# Altium PCB COREV1.1_pcb5_0.PcbDoc (part 11 of 14)
Units mil, origin at the board's own origin, x right, y up, seen from the top; angles counter-clockwise.
Board outline 2860 x 2420 mil, 6 copper layers (Top Layer, GND, SIGNAL_1, SIGNAL_2, POWER, Bottom Layer); 110 components, 241 nets, 882 pads, 697 vias.
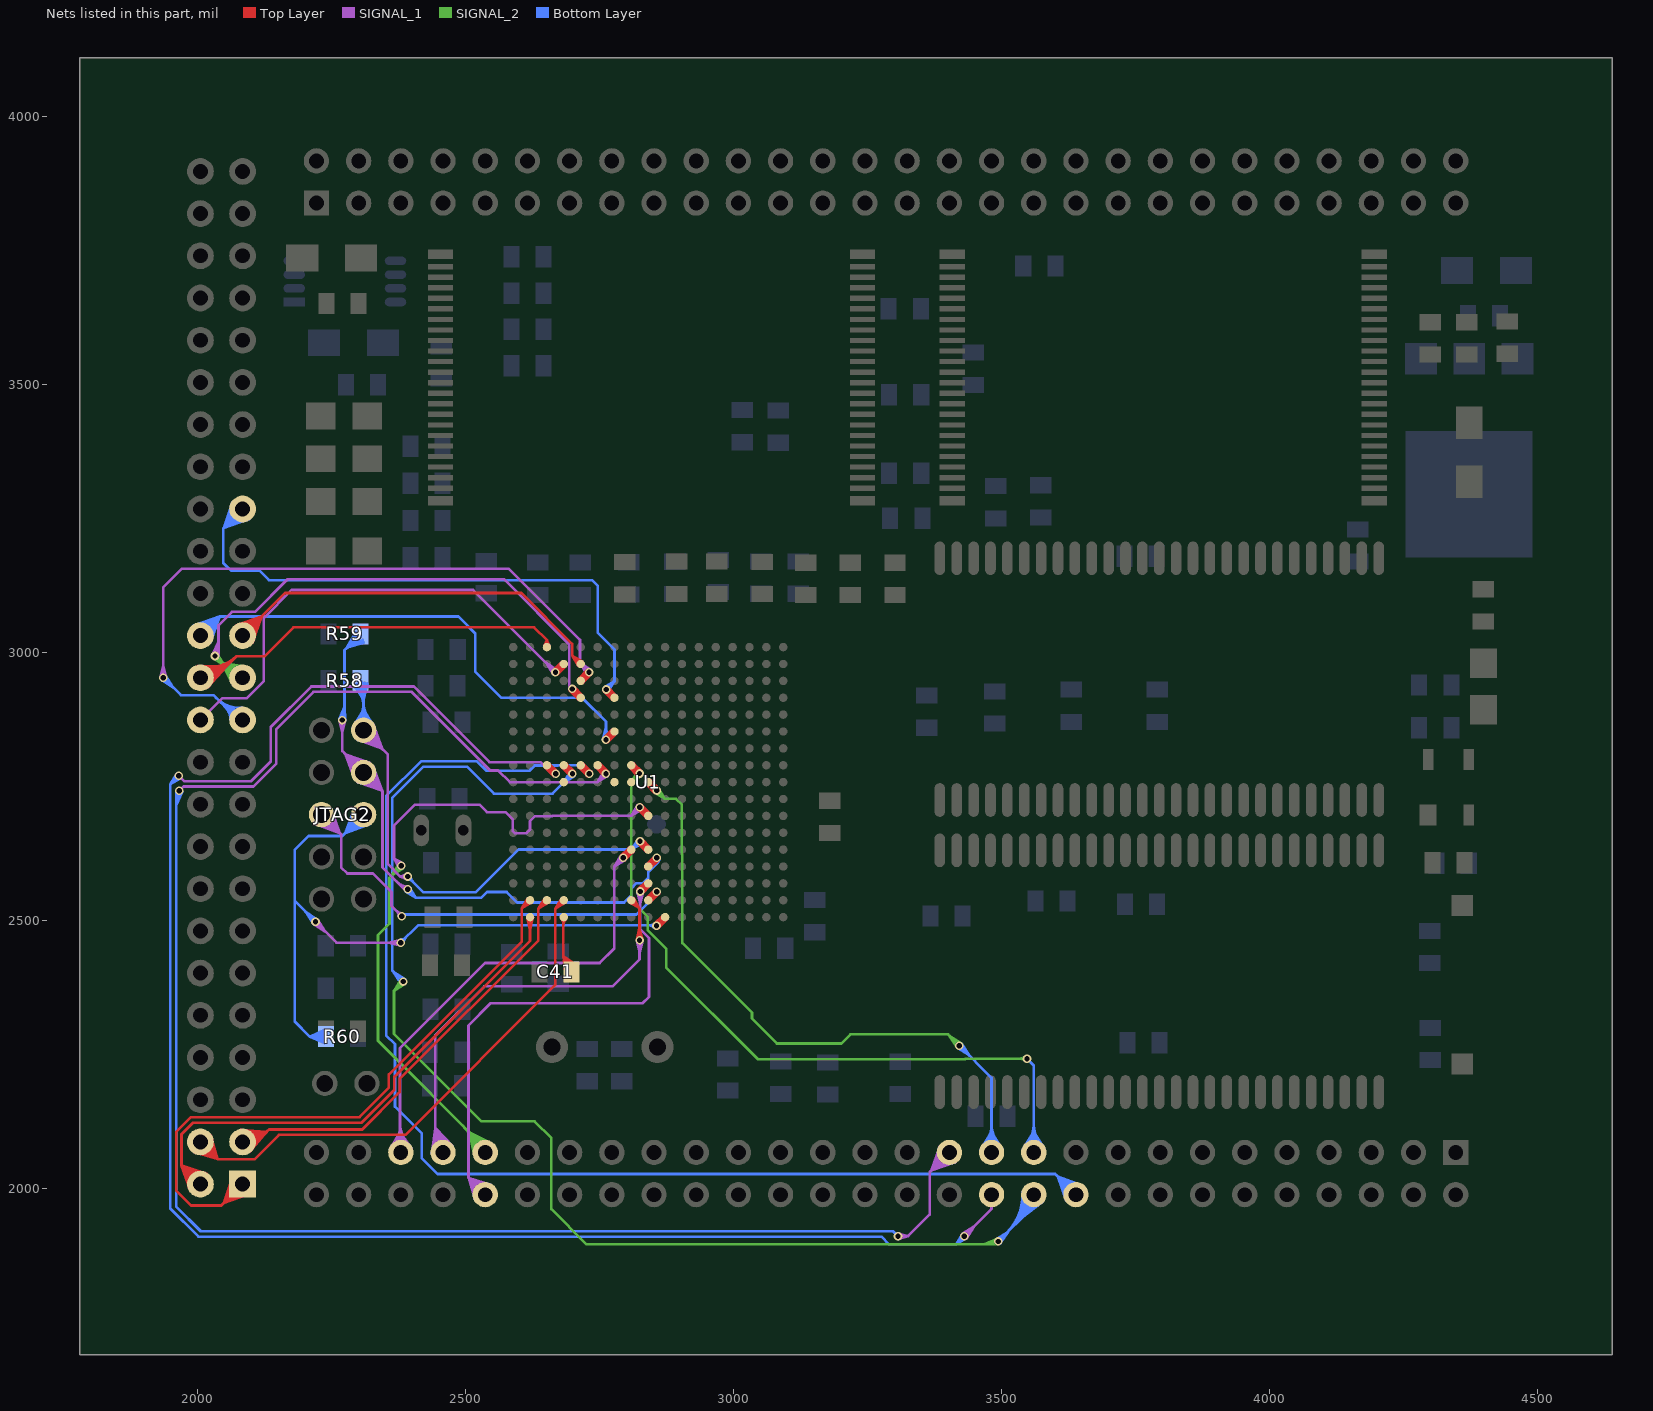
[diagram p15: the nets of this part, all layers, seen from the top]

## Via types
v1: diameter 16, hole 10, Top Layer to Bottom Layer, tented both sides, 638 vias
v2: diameter 30, hole 18, Top Layer to Bottom Layer, tented both sides, 56 vias
v3: diameter 16, hole 10, Top Layer to Bottom Layer, 2 vias
v4: diameter 30, hole 16, Top Layer to Bottom Layer, tented both sides, 1 vias

## Nets (pads, with @x,y where several pads share a name; then routed paths per layer and width w, separated by ;. In a path a pad name is that pad's centre, name@x,y a point inside that pad or via, vN(x,y) a via of type N, cw(c..) or ccw(c..) an arc to the next point about the centre after c; other vN are vias at no path point) (continued)
RXD2: pad.PA48 U1.J15 | length 1743.7
  Top Layer w5: v1@2821.39,2557.38 U1.J15@2836.64,2572.45 ; v1@2823.56,2559.05 U1.J15@2844.18,2564.91 ; v1@2825.73,2559.5 ccw(c2825.73,2572.78) 2835.12,2563.39 ccw(c2844.51,2554) v1@2831.23,2554 ; v1@2829.11,2549.66 U1.J15@2844.18,2564.91 ; v1@2830.78,2551.83 U1.J15@2836.64,2572.45 ; U1.J15@2835.51,2569.16 cw(c2822.54,2569.16) 2831.71,2559.98 cw(c2840.89,2550.81) U1.J15@2840.89,2563.78 ; v1(2825.73,2554) U1.J15@2840.89,2569.16 ; v1(2825.73,2554) U1.J15@2836.64,2572.45 ; v1(2825.73,2554) U1.J15@2844.18,2564.91 ; v1(2825.73,2554) U1.J15@2840.89,2569.16 ; U1.J15@2840.89,2569.16 2830.08,2550.64 U1.J15@2840.89,2569.16 ; U1.J15@2840.89,2569.16 2822.37,2558.36 U1.J15@2840.89,2569.16
  SIGNAL_1 w5: pad.PA48@2515.76,1990.62 ccw(c2480.68,1994.48) 2505.64,2019.44 ; pad.PA48@2518.67,1977.4 2505.63,2019.44 ; pad.PA48@2520.73,1990.08 ccw(c2493.95,1993.02) 2513,2012.07 ccw(c2532.05,2031.12) pad.PA48@2534.99,2004.34 ; pad.PA48@2523.46,1979.2 2505.63,2019.44 ; pad.PA48@2527.96,1981.51 2505.63,2019.44 ; pad.PA48@2532.14,1984.3 2505.63,2019.44 ; pad.PA48@2534.45,2009.31 cw(c2530.59,2044.39) 2505.64,2019.44 ; pad.PA48@2536.76,1988.32 2505.63,2019.44 ; pad.PA48@2540.77,1992.94 2505.63,2019.44 ; pad.PA48@2543.56,1997.11 2505.63,2019.44 ; pad.PA48@2545.88,2001.61 2505.63,2019.44 ; pad.PA48@2547.67,2006.4 2505.63,2019.44 ; 2564.21,2345.5 2588,2345.5 ; v1@2820.27,2553.34 2825.73,2531 v1@2831.19,2553.34 ; v1@2821.84,2550.11 cw(c2812.45,2540.72) 2825.73,2540.72 cw(c2839.01,2540.72) v1@2829.62,2550.11 ; v1(2825.73,2554) 2825.73,2483.69 2842.4,2467.02 2842.4,2357.34 2830.56,2345.5 2588,2345.5 ; 2505.63,2019.44 2505.63,2304.13 2547,2345.5 2588,2345.5
SDCLK: pad.PA20 U1.N8 | length 3350.2
  Top Layer w5: U1.N8@2714.15,2789.63 U1.N8@2714.9,2789.63 ; U1.N8@2714.9,2784.26 cw(c2714.9,2771.28) 2724.08,2780.46 cw(c2733.25,2789.63) U1.N8@2720.28,2789.63 ; v1@2725.5,2773.53 ccw(c2712.22,2773.53) 2721.61,2782.92 ccw(c2731,2792.31) v1@2731,2779.03 ; v1@2726,2771.25 U1.N8@2719.12,2792.95 ; v1@2726.67,2770.14 U1.N8@2714.9,2789.63 ; v1@2727.59,2769.22 U1.N8@2711.58,2785.41 ; v1@2733.28,2778.54 U1.N8@2711.58,2785.41 ; v1@2734.39,2777.86 U1.N8@2714.9,2789.63 ; v1@2735.31,2776.95 U1.N8@2719.12,2792.95 ; U1.N8@2711.58,2785.41 v1(2731,2773.53) ; U1.N8@2711.58,2785.41 v1(2731,2773.53) ; U1.N8@2714.9,2789.63 v1(2731,2773.53) ; U1.N8@2714.9,2789.63 v1(2731,2773.53) ; U1.N8@2719.12,2792.95 v1(2731,2773.53) ; U1.N8@2719.12,2792.95 v1(2731,2773.53)
  Bottom Layer w5: v1@2725.5,2773.53 ccw(c2712.22,2773.53) 2721.61,2782.92 ccw(c2731,2792.31) v1@2731,2779.03 ; v1@2726.67,2770.15 2715.03,2789.5 ; v1@2734.39,2777.87 2715.03,2789.5 ; pad.PA20@3618,1988.32 ccw(c3567,1988.32) 3603.06,2024.37 ccw(c3639.12,2060.43) pad.PA20@3639.12,2009.44 ; pad.PA20@3621.28,1977 3604.89,2022.54 ; pad.PA20@3623,1988.32 ccw(c3584.07,1988.32) 3611.6,2015.84 ccw(c3639.12,2043.36) pad.PA20@3639.12,2004.44 ; pad.PA20@3625.98,1978.97 3604.89,2022.54 ; pad.PA20@3628,1988.32 ccw(c3601.15,1988.32) 3620.13,2007.3 ccw(c3639.12,2026.29) pad.PA20@3639.12,1999.44 ; pad.PA20@3630.4,1981.41 3604.89,2022.54 ; pad.PA20@3634.52,1984.27 3604.89,2022.54 ; pad.PA20@3639.12,1988.32 3600.43,2027 2448,2027 2418,2057 2418,2103 2368.5,2152.5 2368.5,2269.14 2352,2285.64 2352,2731.83 2417.17,2797 2521.15,2797 2538.65,2779.5 2619.86,2779.5 2629.37,2789.01 2672.51,2789.01 2673,2789.5 2715.03,2789.5 ; pad.PA20@3643.16,1992.91 3604.89,2022.54 ; pad.PA20@3646.03,1997.03 3604.89,2022.54 ; pad.PA20@3648.46,2001.46 3604.89,2022.54 ; pad.PA20@3650.44,2006.15 3604.89,2022.54 ; 2715.03,2789.5 v1(2731,2773.53) 2715.03,2789.5
SDCMD: pad.PA21 U1.K8 | length 2245.6
  Top Layer w5: U1.K8@2809.39,2784.26 cw(c2809.39,2771.28) 2818.56,2780.46 cw(c2827.74,2789.63) U1.K8@2814.76,2789.63 ; v1@2819.26,2774.26 ccw(c2805.99,2774.26) 2815.37,2783.65 ccw(c2824.76,2793.03) v1@2824.76,2779.76 ; v1@2819.72,2772.06 U1.K8@2813.63,2792.93 ; v1@2820.41,2770.89 U1.K8@2809.39,2789.63 ; v1@2821.37,2769.93 U1.K8@2806.09,2785.39 ; v1@2826.96,2779.3 U1.K8@2806.09,2785.39 ; v1@2828.13,2778.61 U1.K8@2809.39,2789.63 ; v1@2829.09,2777.65 U1.K8@2813.63,2792.93 ; U1.K8@2806.09,2785.39 v1(2824.76,2774.26) ; U1.K8@2806.09,2785.39 v1(2824.76,2774.26) ; U1.K8@2809.39,2789.63 v1(2824.76,2774.26) ; U1.K8@2809.39,2789.63 v1(2824.76,2774.26) ; U1.K8@2813.63,2792.93 v1(2824.76,2774.26) ; U1.K8@2813.63,2792.93 v1(2824.76,2774.26)
  SIGNAL_2 w5: 2809.5,2688.5 2809.5,2709 ; 2814.16,2761.94 ccw(c2801.84,2774.26) v1@2819.26,2774.26 ; 2818.3,2766.08 cw(c2824.76,2759.62) v1@2824.76,2768.76 ; v1@2820.26,2777.41 2809.5,2757.28 ; v1@2828.38,2770.11 2809.5,2757.28 ; v1@3543.89,2238.33 ccw(c3534.5,2228.94) 3534.5,2242.22 ccw(c3534.5,2255.5) v1@3543.89,2246.11 ; v1(3547.78,2242.22) 3433.28,2242.22 3432.06,2241 3045.8,2241 2874.5,2412.3 2874.5,2447.39 2839.96,2481.93 2839.96,2507.2 2809.5,2537.66 2809.5,2709 ; 2809.5,2709 2809.5,2757.28 ; 2809.5,2757.28 v1(2824.76,2774.26) 2824.76,2772.54 2809.5,2757.28
  Bottom Layer w5: pad.PA21@3540.06,2072.83 3560.38,2105.68 ; pad.PA21@3544.61,2070.42 3560.38,2105.68 ; pad.PA21@3545.44,2081.99 ccw(c3509.39,2118.05) 3560.38,2118.05 ccw(c3611.37,2118.05) pad.PA21@3575.31,2081.99 ; v1(3547.78,2242.22) 3560.38,2229.62 pad.PA21@3560.38,2067.06 ; pad.PA21@3548.98,2078.46 ccw(c3521.46,2105.98) 3560.38,2105.98 ccw(c3599.3,2105.98) pad.PA21@3571.78,2078.46 ; pad.PA21@3549.37,2068.66 3560.38,2105.68 ; pad.PA21@3552.51,2074.92 ccw(c3533.53,2093.91) 3560.38,2093.91 ccw(c3587.23,2093.91) pad.PA21@3568.24,2074.92 ; pad.PA21@3554.28,2067.54 3560.38,2105.68 ; pad.PA21@3566.48,2067.54 3560.38,2105.68 ; pad.PA21@3571.38,2068.66 3560.38,2105.68 ; pad.PA21@3576.14,2070.42 3560.38,2105.68 ; pad.PA21@3580.7,2072.83 3560.38,2105.68
SDDATA0: pad.PA24 U1.R8 | length 3877.7
  Top Layer w5: U1.R8@2651.91,2784.26 cw(c2651.91,2771.28) 2661.08,2780.46 cw(c2670.26,2789.63) U1.R8@2657.28,2789.63 ; v1@2662.53,2773.51 ccw(c2649.25,2773.51) 2658.64,2782.9 ccw(c2668.03,2792.29) v1@2668.03,2779.01 ; v1@2663.03,2771.22 U1.R8@2656.13,2792.96 ; v1@2663.7,2770.12 U1.R8@2651.91,2789.63 ; v1@2664.62,2769.2 U1.R8@2648.58,2785.41 ; v1@2670.32,2778.51 U1.R8@2648.58,2785.41 ; v1@2671.42,2777.84 U1.R8@2651.91,2789.63 ; v1@2672.34,2776.92 U1.R8@2656.13,2792.96 ; U1.R8@2648.58,2785.41 v1(2668.03,2773.51) ; U1.R8@2648.58,2785.41 v1(2668.03,2773.51) ; U1.R8@2651.91,2789.63 v1(2668.03,2773.51) ; U1.R8@2651.91,2789.63 v1(2668.03,2773.51) ; U1.R8@2656.13,2792.96 v1(2668.03,2773.51) ; U1.R8@2656.13,2792.96 v1(2668.03,2773.51)
  SIGNAL_1 w5: v1(1965,2770) 1975,2760 2100.12,2760 2136.5,2796.38 2136.5,2860.84 2212.16,2936.5 2403.78,2936.5 2544.78,2795.5 2639.5,2795.5 2661.49,2773.51 v1(2668.03,2773.51) ; v1@3427.54,1915.27 3449.61,1929.61 v1@3435.27,1907.54 ; v1(3431,1911) 3481.64,1961.64 pad.PA24@3481.64,1988.32 ; v1@3431,1916.5 ccw(c3431,1929.78) 3440.39,1920.39 ccw(c3449.78,1911) v1@3436.5,1911
  Bottom Layer w5: v1@1959.5,2770 cw(c1946.22,2770) 1955.61,2760.61 cw(c1965,2751.22) v1@1965,2764.5 ; v1@1960.67,2773.39 1949,2754 ; v1@1968.39,2765.67 1949,2754 ; v1@3425.5,1911 cw(c3412.22,1911) 3421.61,1901.61 cw(c3431,1892.22) v1@3431,1905.5 ; v1@3426.65,1914.37 3415.5,1895.5 ; v1@3434.37,1906.65 3415.5,1895.5 ; 1949,2754 v1(1965,2770) 1949,2754 ; 1949,2754 1949,1962.72 2001.72,1910 3276,1910 3290.5,1895.5 3415.5,1895.5 ; 3415.5,1895.5 v1(3431,1911) 3415.5,1895.5
SDDATA1: pad.PA25 U1.M8 | length 4491.8
  Top Layer w5: U1.M8@2746.4,2784.26 cw(c2746.4,2771.28) 2755.57,2780.46 cw(c2764.75,2789.63) U1.M8@2751.77,2789.63 ; 2752.59,2783.44 cw(c2743.15,2774) v1@2756.5,2774 ; 2752.66,2783.37 ccw(c2762,2792.71) v1@2762,2779.5 ; v1@2756.97,2771.78 U1.M8@2750.63,2792.94 ; v1@2757.65,2770.63 U1.M8@2746.4,2789.63 ; v1@2758.6,2769.68 U1.M8@2743.09,2785.4 ; v1@2764.23,2779.03 U1.M8@2743.09,2785.4 ; v1@2765.38,2778.34 U1.M8@2746.4,2789.63 ; v1@2766.33,2777.4 U1.M8@2750.63,2792.94 ; U1.M8@2743.09,2785.4 v1(2762,2774) ; U1.M8@2743.09,2785.4 v1(2762,2774) ; U1.M8@2746.4,2789.63 v1(2762,2774) ; U1.M8@2746.4,2789.63 v1(2762,2774) ; U1.M8@2750.63,2792.94 v1(2762,2774) ; U1.M8@2750.63,2792.94 v1(2762,2774)
  SIGNAL_1 w5: v1(1965.83,2741.83) 1974,2750 2104.26,2750 2146.5,2792.24 2146.5,2856.69 2216.31,2926.5 2399.64,2926.5 2546.14,2780 2560.65,2780 2582.65,2758.01 2746.01,2758.01 ; v1@2756.5,2774 cw(c2743.22,2774) 2752.61,2764.61 cw(c2762,2755.22) v1@2762,2768.5 ; v1@2757.67,2777.39 2746.01,2758.01 ; v1@2765.39,2769.67 2746.01,2758.01 ; v1(3307,1911) 3326,1911 ; v1@3307.8,1905.56 3326,1911 ; v1@3307.8,1916.44 3326,1911 ; v1@3310.89,1907.11 cw(c3320.28,1897.72) 3320.28,1911 cw(c3320.28,1924.28) v1@3310.89,1914.89 ; pad.PA25@3381.78,2067.06 cw(c3330.78,2067.06) 3366.84,2031 cw(c3402.9,1994.94) pad.PA25@3402.9,2045.93 ; pad.PA25@3385.06,2078.37 3368.67,2032.83 ; pad.PA25@3386.78,2067.06 cw(c3347.85,2067.06) 3375.38,2039.53 cw(c3402.9,2012.01) pad.PA25@3402.9,2050.93 ; pad.PA25@3389.76,2076.4 3368.67,2032.83 ; pad.PA25@3391.78,2067.06 cw(c3364.93,2067.06) 3383.91,2048.07 cw(c3402.9,2029.08) pad.PA25@3402.9,2055.93 ; pad.PA25@3394.18,2073.97 3368.67,2032.83 ; pad.PA25@3398.3,2071.1 3368.67,2032.83 ; pad.PA25@3402.9,2067.06 3366,2030.16 3366,1951 3326,1911 ; pad.PA25@3406.94,2062.46 3368.67,2032.83 ; pad.PA25@3409.81,2058.34 3368.67,2032.83 ; pad.PA25@3412.24,2053.92 3368.67,2032.83 ; pad.PA25@3414.22,2049.22 3368.67,2032.83 ; 2746.01,2758.01 v1(2762,2774) 2746.01,2758.01
  Bottom Layer w5: 1960,2714.47 cw(c1993.19,2714.47) v1@1969.72,2737.94 ; 1960,2726.54 cw(c1981.12,2726.54) v1@1966.19,2741.48 ; v1@1960.37,2742.45 1960,2714.83 ; v1@1971.07,2740.14 1960,2714.83 ; v1(3307,1911) 3298,1920 2005.86,1920 1960,1965.86 1960,2736 v1(1965.83,2741.83) 1960,2714.83
SDDATA2: pad.PA22 U1.P8 | length 3920.9
  Top Layer w5: U1.P8@2683.41,2784.26 cw(c2683.41,2771.28) 2692.58,2780.46 cw(c2701.75,2789.63) U1.P8@2688.78,2789.63 ; v1@2694.03,2773.51 ccw(c2680.75,2773.51) 2690.14,2782.9 ccw(c2699.53,2792.29) v1@2699.53,2779.01 ; v1@2694.52,2771.22 U1.P8@2687.63,2792.96 ; v1@2695.2,2770.12 U1.P8@2683.41,2789.63 ; v1@2696.11,2769.2 U1.P8@2680.08,2785.41 ; v1@2701.81,2778.51 U1.P8@2680.08,2785.41 ; v1@2702.92,2777.84 U1.P8@2683.41,2789.63 ; v1@2703.84,2776.92 U1.P8@2687.63,2792.96 ; U1.P8@2680.08,2785.41 v1(2699.53,2773.51) ; U1.P8@2680.08,2785.41 v1(2699.53,2773.51) ; U1.P8@2683.41,2789.63 v1(2699.53,2773.51) ; U1.P8@2683.41,2789.63 v1(2699.53,2773.51) ; U1.P8@2687.63,2792.96 v1(2699.53,2773.51) ; U1.P8@2687.63,2792.96 v1(2699.53,2773.51)
  SIGNAL_2 w5: v1@2378,2386 cw(c2364.72,2386) 2374.11,2376.61 cw(c2383.5,2367.22) v1@2383.5,2380.5 ; v1@2379.19,2389.42 2366.5,2369 ; v1@2386.92,2381.69 2366.5,2369 ; 3467.44,1895.5 ccw(c3467.44,1927.56) v1@3490.11,1904.89 ; 3479.51,1895.5 ccw(c3479.51,1915.49) v1@3493.65,1901.35 ; v1@3488.5,1895.5 2725.64,1895.5 2660,1961.14 2660,2094 2629,2125 2529.65,2125 2366.5,2288.15 2366.5,2369 ; v1@3492.34,1906.24 3467.51,1895.5 ; v1(3494,1901) 3467.51,1895.5 ; v1@3494.57,1895.53 3467.51,1895.5 ; 2366.5,2369 v1(2383.5,2386) 2366.5,2369
  Bottom Layer w5: v1@2378,2386 ccw(c2364.72,2386) 2374.11,2395.39 ccw(c2383.5,2404.78) v1@2383.5,2391.5 ; v1@2379.23,2382.54 2364.89,2404.61 ; v1@2386.96,2390.27 2364.89,2404.61 ; v1@2694.03,2773.51 cw(c2680.75,2773.51) 2690.14,2764.12 cw(c2699.53,2754.73) v1@2699.53,2768.01 ; v1@2695.25,2776.97 2680.92,2754.9 ; v1@2702.99,2769.23 2680.92,2754.9 ; v1@3490.54,1905.27 3512.61,1919.61 v1@3498.27,1897.54 ; v1(3494,1901) 3560.38,1967.38 pad.PA22@3560.38,1988.32 3536.93,1943.93 ; v1@3494,1906.5 ccw(c3494,1919.78) 3503.39,1910.39 ccw(c3512.78,1901) v1@3499.5,1901 ; 3509.52,1916.52 ccw(c3437.71,1988.32) pad.PA22@3539.26,1988.32 ; 3518.05,1925.05 ccw(c3454.79,1988.32) pad.PA22@3544.26,1988.32 ; 3526.59,1933.59 ccw(c3471.86,1988.32) pad.PA22@3549.26,1988.32 ; 3535.12,1942.12 ccw(c3488.93,1988.32) pad.PA22@3554.26,1988.32 ; pad.PA22@3540.04,1994.03 3536.93,1943.93 ; 3543.66,1950.66 ccw(c3506,1988.32) pad.PA22@3559.26,1988.32 ; pad.PA22@3545.1,1993.46 3536.93,1943.93 ; pad.PA22@3550.03,1992.39 3536.93,1943.93 ; 3552.19,1959.19 ccw(c3523.07,1988.32) pad.PA22@3564.26,1988.32 ; pad.PA22@3554.8,1990.84 3536.93,1943.93 ; pad.PA22@3565.61,1985.13 3536.93,1943.93 ; pad.PA22@3569.58,1982.06 3536.93,1943.93 ; pad.PA22@3573.24,1978.59 3536.93,1943.93 ; pad.PA22@3576.56,1974.74 3536.93,1943.93 ; 2364.89,2404.61 v1(2383.5,2386) 2363.5,2406 2363.5,2729.19 2421.31,2787 2502.5,2787 2553,2736.5 2662.52,2736.5 v1(2699.53,2773.51) 2680.92,2754.9
SDDATA3: pad.PA23 U1.J9 | length 2193.6
  Top Layer w5: U1.J9@2840.89,2752.76 cw(c2840.89,2739.79) 2850.06,2748.96 cw(c2859.23,2758.13) U1.J9@2846.26,2758.13 ; v1@2851.02,2742.5 ccw(c2837.74,2742.5) 2847.13,2751.89 ccw(c2856.52,2761.28) v1@2856.52,2748 ; v1@2851.49,2740.27 U1.J9@2845.12,2761.44 ; v1@2852.18,2739.12 U1.J9@2840.89,2758.13 ; v1@2853.12,2738.18 U1.J9@2837.58,2753.9 ; v1@2858.75,2747.53 U1.J9@2837.58,2753.9 ; v1@2859.9,2746.84 U1.J9@2840.89,2758.13 ; v1@2860.84,2745.9 U1.J9@2845.12,2761.44 ; U1.J9@2837.58,2753.9 v1(2856.52,2742.5) ; U1.J9@2837.58,2753.9 v1(2856.52,2742.5) ; U1.J9@2840.89,2758.13 v1(2856.52,2742.5) ; U1.J9@2840.89,2758.13 v1(2856.52,2742.5) ; U1.J9@2845.12,2761.44 v1(2856.52,2742.5) ; U1.J9@2845.12,2761.44 v1(2856.52,2742.5)
  SIGNAL_2 w5: v1@2853.15,2738.15 2872,2727.02 ; v1@2856.52,2737 cw(c2856.52,2723.72) 2865.91,2733.11 cw(c2875.3,2742.5) v1@2862.02,2742.5 ; v1(2856.52,2742.5) 2872,2727.02 ; v1@2860.87,2745.87 2872,2727.02 ; 2903.73,2623.69 2903.73,2716.19 2892.9,2727.02 2872,2727.02 ; 2904.5,2622.92 2904.5,2458 3034.5,2328 3034.5,2317 3081,2270.5 3201.5,2270.5 3218.5,2287.5 3400.5,2287.5 v1(3421.5,2266.5) 3402.89,2285.11 ; v1@3416,2266.5 ccw(c3402.72,2266.5) 3412.11,2275.89 ccw(c3421.5,2285.28) v1@3421.5,2272 ; v1@3417.23,2263.04 3402.89,2285.11 ; v1@3424.96,2270.77 3402.89,2285.11
  Bottom Layer w5: v1@3418.04,2262.23 3440.11,2247.89 v1@3425.77,2269.96 ; v1@3421.5,2261 cw(c3421.5,2247.72) 3430.89,2257.11 cw(c3440.28,2266.5) v1@3427,2266.5 ; v1(3421.5,2266.5) 3481.64,2206.36 pad.PA23@3481.64,2067.06 ; pad.PA23@3461.32,2072.83 3481.64,2105.68 ; pad.PA23@3465.87,2070.42 3481.64,2105.68 ; pad.PA23@3466.7,2081.99 ccw(c3430.64,2118.05) 3481.64,2118.05 ccw(c3532.63,2118.05) pad.PA23@3496.57,2081.99 ; pad.PA23@3470.24,2078.46 ccw(c3442.72,2105.98) 3481.64,2105.98 ccw(c3520.56,2105.98) pad.PA23@3493.04,2078.46 ; pad.PA23@3470.63,2068.66 3481.64,2105.68 ; pad.PA23@3473.77,2074.92 ccw(c3454.79,2093.91) 3481.64,2093.91 ccw(c3508.49,2093.91) pad.PA23@3489.5,2074.92 ; pad.PA23@3475.54,2067.54 3481.64,2105.68 ; pad.PA23@3487.74,2067.54 3481.64,2105.68 ; pad.PA23@3492.64,2068.66 3481.64,2105.68 ; pad.PA23@3497.4,2070.42 3481.64,2105.68 ; pad.PA23@3501.95,2072.83 3481.64,2105.68
SPICLK: U1.L9
SPIMISO: U1.K9
SPIMOSI: U1.P9
TCK: JTAG2.9 R58.2 U1.J13 | length 2681.7
  Top Layer w5: v1@2821.18,2644.13 U1.J13@2836.65,2628.85 ; v1@2823.32,2642.48 U1.J13@2844.19,2636.39 ; v1@2825.51,2642.02 cw(c2825.51,2628.75) 2834.9,2638.13 cw(c2844.29,2647.52) v1@2831.01,2647.52 ; v1@2828.9,2651.85 U1.J13@2844.19,2636.39 ; v1@2830.55,2649.72 U1.J13@2836.65,2628.85 ; U1.J13@2835.51,2632.15 ccw(c2822.54,2632.15) 2831.71,2641.32 ccw(c2840.89,2650.5) U1.J13@2840.89,2637.52 ; v1(2825.51,2647.52) U1.J13@2840.89,2632.15 ; v1(2825.51,2647.52) U1.J13@2844.19,2636.39 ; v1(2825.51,2647.52) U1.J13@2836.65,2628.85 ; v1(2825.51,2647.52) U1.J13@2840.89,2632.15 ; U1.J13@2840.89,2632.15 2822.15,2643.17 U1.J13@2840.89,2632.15 ; U1.J13@2840.89,2632.15 2829.86,2650.89 U1.J13@2840.89,2632.15
  SIGNAL_1 w5: JTAG2.9@2298.58,2837.08 2344.13,2820.68 ; JTAG2.9@2300.56,2841.77 2344.13,2820.68 ; JTAG2.9@2302.99,2846.2 2344.13,2820.68 ; JTAG2.9@2305.85,2850.32 2344.13,2820.68 ; JTAG2.9@2309.9,2833.79 cw(c2309.9,2782.8) 2345.96,2818.85 cw(c2382.01,2854.91) JTAG2.9@2331.02,2854.91 ; JTAG2.9@2309.9,2838.79 cw(c2309.9,2799.87) 2337.42,2827.39 cw(c2364.94,2854.91) JTAG2.9@2326.02,2854.91 ; JTAG2.9@2309.9,2843.79 cw(c2309.9,2816.94) 2328.88,2835.93 cw(c2347.87,2854.91) JTAG2.9@2321.02,2854.91 ; JTAG2.9@2309.9,2854.91 2355,2809.81 2355,2605.08 2378.08,2582 ; JTAG2.9@2314.49,2858.96 2344.13,2820.68 ; JTAG2.9@2318.61,2861.82 2344.13,2820.68 ; JTAG2.9@2323.04,2864.25 2344.13,2820.68 ; JTAG2.9@2327.73,2866.23 2344.13,2820.68 ; v1@2388.11,2578.11 ccw(c2378.72,2568.72) 2378.72,2582 ccw(c2378.72,2595.28) v1@2388.11,2585.89 ; v1@2390.91,2576.61 2378.08,2582 ; v1@2390.91,2587.39 2378.08,2582 ; 2378.08,2582 v1(2392,2582) 2378.08,2582
  Bottom Layer w5: JTAG2.9@2289.58,2860.69 2309.9,2893.53 ; R58.2@2292.61,2937.89 2309.9,2911.91 ; JTAG2.9@2294.13,2858.28 2309.9,2893.53 ; JTAG2.9@2294.96,2869.85 ccw(c2258.91,2905.91) 2309.9,2905.91 ccw(c2360.89,2905.91) JTAG2.9@2324.83,2869.85 ; R58.2@2295.35,2933.75 cw(c2260.23,2898.63) 2309.9,2898.63 ; R58.2@2297.03,2940.34 2309.9,2911.91 ; JTAG2.9@2298.5,2866.31 ccw(c2270.98,2893.83) 2309.9,2893.83 ccw(c2348.82,2893.83) JTAG2.9@2321.3,2866.31 ; JTAG2.9@2298.89,2856.51 2309.9,2893.53 ; R58.2@2298.89,2937.29 cw(c2272.3,2910.7) 2309.9,2910.7 ; JTAG2.9@2302.03,2862.78 ccw(c2283.05,2881.76) 2309.9,2881.76 ccw(c2336.75,2881.76) JTAG2.9@2317.76,2862.78 ; R58.2@2302.42,2940.82 cw(c2284.37,2922.77) 2309.9,2922.77 ; JTAG2.9@2303.8,2855.4 2309.9,2893.53 ; R58.2@2304.19,2942.59 2309.9,2911.91 ; R58.2@2304.19,2947.59 2309.9,2941.88 JTAG2.9@2309.9,2854.91 ; 2309.9,2926.2 cw(c2320.58,2926.2) R58.2@2313.03,2933.75 ; R58.2@2311.67,2943.07 2309.9,2911.91 ; JTAG2.9@2316,2855.4 2309.9,2893.53 ; R58.2@2316.69,2942.37 2309.9,2911.91 ; JTAG2.9@2320.9,2856.51 2309.9,2893.53 ; JTAG2.9@2325.66,2858.28 2309.9,2893.53 ; JTAG2.9@2330.22,2860.69 2309.9,2893.53 ; v1@2392,2576.5 cw(c2392,2563.22) 2401.39,2572.61 cw(c2410.78,2582) v1@2397.5,2582 ; v1(2392,2582) 2421.5,2552.5 2518.84,2552.5 2598.84,2632.5 2755.33,2632.5 2755.58,2632.25 2768.42,2632.25 2768.67,2632.5 2810.49,2632.5 ; v1@2820.01,2647.52 cw(c2806.73,2647.52) 2816.12,2638.13 cw(c2825.51,2628.75) v1@2825.51,2642.02 ; v1@2821.15,2650.88 2810.49,2632.5 ; v1@2828.87,2643.16 2810.49,2632.5 ; 2810.49,2632.5 v1(2825.51,2647.52) 2810.49,2632.5
TDI: JTAG2.5 R60.2 U1.H17 | length 2631.3
  Top Layer w5: v1@2852.07,2493.58 U1.H17@2868.16,2509.49 ; v1@2854.12,2495.18 U1.H17@2875.7,2501.94 ; v1@2856.39,2495.67 ccw(c2856.39,2508.95) 2865.78,2499.56 ccw(c2875.16,2490.17) v1@2861.89,2490.17 ; v1@2859.8,2485.85 U1.H17@2875.7,2501.94 ; v1@2861.4,2487.9 U1.H17@2868.16,2509.49 ; U1.H17@2867.01,2506.16 cw(c2854.03,2506.16) 2863.21,2496.99 cw(c2872.38,2487.82) U1.H17@2872.38,2500.79 ; v1(2856.39,2490.17) U1.H17@2872.38,2506.16 ; v1(2856.39,2490.17) U1.H17@2868.16,2509.49 ; v1(2856.39,2490.17) U1.H17@2875.7,2501.94 ; v1(2856.39,2490.17) U1.H17@2872.38,2506.16 ; U1.H17@2872.38,2506.16 2860.72,2486.78 U1.H17@2872.38,2506.16 ; U1.H17@2872.38,2506.16 2853,2494.5 U1.H17@2872.38,2506.16
  SIGNAL_1 w5: v1@2216.54,2493.23 2238.61,2478.89 v1@2224.27,2500.96 ; v1@2220,2492 cw(c2220,2478.72) 2229.39,2488.11 cw(c2238.78,2497.5) v1@2225.5,2497.5 ; v1(2220,2497.5) 2259,2458.5 v1(2379,2458.5) ; v1@2375.11,2454.61 ccw(c2365.72,2445.22) 2365.72,2458.5 ccw(c2365.72,2471.78) v1@2375.11,2462.39 ; v1@2378.34,2453.04 2356,2458.5 v1@2378.34,2463.96
  Bottom Layer w5: v1@2214.5,2497.5 ccw(c2201.22,2497.5) 2210.61,2506.89 ccw(c2220,2516.28) v1@2220,2503 ; v1@2215.73,2494.04 2201.39,2516.11 ; v1@2223.46,2501.77 2201.39,2516.11 ; R60.2@2230.67,2274.57 ccw(c2209.33,2253.23) 2209.33,2283.41 ccw(c2209.33,2313.59) R60.2@2230.67,2292.25 ; R60.2@2234.2,2278.11 ccw(c2221.4,2265.3) 2221.4,2283.41 ccw(c2221.4,2301.52) R60.2@2234.2,2288.71 ; R60.2@2236.9,2271.18 2209.5,2283.41 ; R60.2@2236.9,2295.64 2209.5,2283.41 ; R60.2@2238.57,2275.97 2209.5,2283.41 ; R60.2@2238.57,2290.85 2209.5,2283.41 ; R60.2@2239.5,2283.41 2209.09,2283.41 2181.5,2311 2181.5,2536 ; JTAG2.5@2288.78,2697.43 cw(c2237.78,2697.43) 2273.84,2661.37 cw(c2309.9,2625.32) JTAG2.5@2309.9,2676.31 ; JTAG2.5@2292.06,2708.75 2275.67,2663.2 ; JTAG2.5@2293.78,2697.43 cw(c2254.85,2697.43) 2282.38,2669.91 cw(c2309.9,2642.39) JTAG2.5@2309.9,2681.31 ; JTAG2.5@2296.76,2706.77 2275.67,2663.2 ; JTAG2.5@2298.78,2697.43 cw(c2271.93,2697.43) 2290.91,2678.45 cw(c2309.9,2659.46) JTAG2.5@2309.9,2686.31 ; JTAG2.5@2301.18,2704.34 2275.67,2663.2 ; JTAG2.5@2305.3,2701.48 2275.67,2663.2 ; JTAG2.5@2309.9,2697.43 2269.97,2657.5 2207,2657.5 2181.5,2632 2181.5,2536 ; JTAG2.5@2313.94,2692.84 2275.67,2663.2 ; JTAG2.5@2316.81,2688.72 2275.67,2663.2 ; JTAG2.5@2319.24,2684.29 2275.67,2663.2 ; JTAG2.5@2321.22,2679.6 2275.67,2663.2 ; v1@2379,2464 ccw(c2379,2477.28) 2388.39,2467.89 ccw(c2397.78,2458.5) v1@2384.5,2458.5 ; v1@2381.5,2461 v1(2379,2458.5) 2411.5,2491 2855.55,2491 v1(2856.39,2490.17) ; 2841.1,2491 cw(c2841.1,2474.88) v1@2852.5,2486.28 ; 2845.12,2491 ccw(c2845.12,2501.44) v1@2852.5,2494.06 ; 2181.5,2536 v1(2220,2497.5) 2201.39,2516.11
TDO: JTAG2.6 U1.J16 | length 1683.6
  Top Layer w5: U1.J16@2840.89,2543.03 ccw(c2840.89,2556.01) 2850.06,2546.83 ccw(c2859.23,2537.66) U1.J16@2846.26,2537.66 ; v1@2851.51,2553.78 cw(c2838.23,2553.78) 2847.62,2544.39 cw(c2857.01,2535) v1@2857.01,2548.28 ; v1@2852,2556.07 U1.J16@2845.11,2534.33 ; v1@2852.68,2557.17 U1.J16@2840.89,2537.66 ; v1@2853.59,2558.09 U1.J16@2837.56,2541.88 ; v1@2859.29,2548.78 U1.J16@2837.56,2541.88 ; v1@2860.4,2549.45 U1.J16@2840.89,2537.66 ; v1@2861.32,2550.37 U1.J16@2845.11,2534.33 ; U1.J16@2837.56,2541.88 v1(2857.01,2553.78) ; U1.J16@2837.56,2541.88 v1(2857.01,2553.78) ; U1.J16@2840.89,2537.66 v1(2857.01,2553.78) ; U1.J16@2840.89,2537.66 v1(2857.01,2553.78) ; U1.J16@2845.11,2534.33 v1(2857.01,2553.78) ; U1.J16@2845.11,2534.33 v1(2857.01,2553.78)
  SIGNAL_1 w5: JTAG2.6@2219.84,2679.6 2265.38,2663.2 ; JTAG2.6@2221.81,2684.29 2265.38,2663.2 ; JTAG2.6@2224.25,2688.72 2265.38,2663.2 ; JTAG2.6@2227.11,2692.84 2265.38,2663.2 ; JTAG2.6@2231.16,2676.31 cw(c2231.16,2625.32) 2267.21,2661.37 cw(c2303.27,2697.43) JTAG2.6@2252.28,2697.43 ; JTAG2.6@2231.16,2681.31 cw(c2231.16,2642.39) 2258.68,2669.91 cw(c2286.2,2697.43) JTAG2.6@2247.28,2697.43 ; JTAG2.6@2231.16,2686.31 cw(c2231.16,2659.46) 2250.14,2678.45 cw(c2269.13,2697.43) JTAG2.6@2242.28,2697.43 ; JTAG2.6@2231.16,2697.43 2268,2660.59 2268,2599 2279.43,2587.57 2327.43,2587.57 2362,2553 2362,2527 v1(2381,2508) ; JTAG2.6@2235.75,2701.48 2265.38,2663.2 ; JTAG2.6@2239.87,2704.34 2265.38,2663.2 ; JTAG2.6@2244.3,2706.77 2265.38,2663.2 ; JTAG2.6@2248.99,2708.75 2265.38,2663.2 ; v1@2375.5,2508 ccw(c2362.22,2508) 2371.61,2517.39 ccw(c2381,2526.78) v1@2381,2513.5
  Bottom Layer w5: v1(2381,2508) 2384,2511 2818.79,2511 2857.01,2549.22 v1(2857.01,2553.78)
TMS: JTAG2.7 R59.2 U1.J14 | length 2839.1
  Top Layer w15: U1.J14@2840.89,2600.65 v1(2857,2616.77)
  SIGNAL_1 w5: v1@2264.54,2873.34 2270,2851 v1@2275.46,2873.34 ; v1@2266.11,2870.11 cw(c2256.72,2860.72) 2270,2860.72 cw(c2283.28,2860.72) v1@2273.89,2870.11 ; v1(2270,2874) 2270,2816.07 JTAG2.7@2309.9,2776.17 ; JTAG2.7@2288.78,2776.17 ccw(c2237.78,2776.17) 2273.84,2812.23 ccw(c2309.9,2848.29) JTAG2.7@2309.9,2797.29 ; JTAG2.7@2292.06,2764.85 2275.67,2810.4 ; JTAG2.7@2293.78,2776.17 ccw(c2254.85,2776.17) 2282.38,2803.69 ccw(c2309.9,2831.22) JTAG2.7@2309.9,2792.29 ; JTAG2.7@2296.76,2766.83 2275.67,2810.4 ; JTAG2.7@2298.58,2758.34 2344.13,2741.94 ; JTAG2.7@2298.78,2776.17 ccw(c2271.93,2776.17) 2290.91,2795.16 ccw(c2309.9,2814.14) JTAG2.7@2309.9,2787.29 ; JTAG2.7@2300.56,2763.03 2344.13,2741.94 ; JTAG2.7@2301.18,2769.26 2275.67,2810.4 ; JTAG2.7@2302.99,2767.46 2344.13,2741.94 ; JTAG2.7@2305.3,2772.13 2275.67,2810.4 ; JTAG2.7@2305.85,2771.58 2344.13,2741.94 ; JTAG2.7@2310.11,2765.05 cw(c2310.59,2739.9) 2328.38,2757.69 cw(c2346.17,2775.47) JTAG2.7@2321.02,2775.96 ; JTAG2.7@2310.21,2760.05 cw(c2310.91,2723.6) 2336.69,2749.38 cw(c2362.47,2775.16) JTAG2.7@2326.02,2775.86 ; JTAG2.7@2310.3,2755.05 cw(c2311.22,2707.3) 2345,2741.07 ; JTAG2.7@2313.94,2780.77 2275.67,2810.4 ; JTAG2.7@2314.49,2780.22 2344.13,2741.94 ; JTAG2.7@2316.81,2784.89 2275.67,2810.4 ; JTAG2.7@2318.61,2783.08 2344.13,2741.94 ; JTAG2.7@2319.24,2789.31 2275.67,2810.4 ; JTAG2.7@2321.22,2794.01 2275.67,2810.4 ; JTAG2.7@2323.04,2785.51 2344.13,2741.94 ; JTAG2.7@2327.73,2787.49 2344.13,2741.94 ; JTAG2.7@2331.02,2775.77 ccw(c2378.77,2774.85) 2345,2741.07 ; 2372.4,2571.62 ccw(c2392,2591.22) v1@2392,2563.5 ; 2380.94,2563.08 ccw(c2392,2574.14) v1@2392,2558.5 ; v1@2386.02,2558 2345,2599.02 2345,2741.07 ; 2275.67,2810.4 JTAG2.7@2309.9,2776.17 ; JTAG2.7@2309.9,2776.17 2345,2741.07
  Bottom Layer w5: v1@2264.7,2875.48 2274,2898.49 ; v1@2266.11,2877.89 ccw(c2247.07,2896.93) 2274,2896.93 ; v1@2269.65,2874.35 ccw(c2259.14,2884.86) 2274,2884.86 ; 2274.31,3004.72 cw(c2304.19,2974.84) R59.2@2304.19,3017.09 ; v1@2275.49,2873.72 2274,2898.49 ; 2282.85,3013.25 cw(c2304.19,2991.91) R59.2@2304.19,3022.09 ; 2286.39,3016.79 ccw(c2273.58,3029.59) R59.2@2291.69,3029.59 ; R59.2@2294.64,3037.66 2278.58,3008.98 ; R59.2@2298.85,3034.86 2278.58,3008.98 ; R59.2@2304.19,3029.59 2278.58,3008.98 ; R59.2@2304.19,3034.59 2274,3004.4 2274,2878 v1(2270,2874) 2274,2898.49 ; R59.2@2308.19,3023.25 2278.58,3008.98 ; R59.2@2310.03,3018.54 2278.58,3008.98 ; v1@2388.63,2553.65 2407.5,2542.5 ; v1@2392,2552.5 cw(c2392,2539.22) 2401.39,2548.61 cw(c2410.78,2558) v1@2397.5,2558 ; v1(2392,2558) 2407.5,2542.5 ; v1@2396.35,2561.37 2407.5,2542.5 ; 2846.17,2595.62 ccw(c2831.42,2610.38) v1@2851.66,2615.43 ; 2852.42,2601.86 ccw(c2841.41,2612.87) v1@2856.51,2616.65 ; v1(2857,2616.77) 2857,2606.44 2841.01,2590.46 2841.01,2578.86 2831.65,2569.5 2819.31,2569.5 2809,2559.19 2809,2546.5 2796,2533.5 2596.28,2533.5 2576.62,2553.16 2540.16,2553.16 2529.5,2542.5 2407.5,2542.5 ; 2858.66,2608.11 ccw(c2851.4,2615.37) v1@2861.37,2617.86
TSXM: pad.PB3 U1.R16 | length 1549
  Top Layer w5: pad.PB3@2080.22,2103.83 2129.2,2105.7 ; pad.PB3@2080.29,2108.93 2129.2,2105.7 ; pad.PB3@2080.67,2098.79 2129.2,2105.7 ; pad.PB3@2081.64,2093.86 2129.2,2105.7 ; pad.PB3@2082.67,2084.62 ccw(c2094.99,2104.2) 2111.35,2087.85 ; pad.PB3@2085.33,2088.86 ccw(c2098.41,2109.64) 2115.78,2092.28 ; pad.PB3@2087.42,2080.07 2129.2,2105.7 ; pad.PB3@2087.99,2093.09 ccw(c2101.83,2115.08) 2120.21,2096.71 ; pad.PB3@2090.27,2075.92 2129.2,2105.7 ; pad.PB3@2090.66,2097.32 ccw(c2105.26,2120.52) 2124.64,2101.14 ; pad.PB3@2093.32,2101.55 ccw(c2108.68,2125.96) 2129.07,2105.57 ; pad.PB3@2093.54,2072.07 2129.2,2105.7 ; pad.PB3@2095.98,2105.78 ccw(c2112.1,2131.4) 2133.5,2110 ; pad.PB3@2097.23,2068.54 2129.2,2105.7 ; U1.R16@2646.54,2537.66 cw(c2633.56,2537.66) 2642.74,2528.49 cw(c2651.91,2519.31) U1.R16@2651.91,2532.29 ; U1.R16@2647.69,2540.99 2635.79,2521.54 ; U1.R16@2655.24,2533.44 2635.79,2521.54 ; 2129.2,2105.7 pad.PB3@2084,2086.74 2110.24,2086.74 2133.5,2110 ; 2133.5,2110 2307.28,2110 2377,2179.72 2377,2204.15 2635.79,2462.94 2635.79,2521.54 ; 2635.79,2521.54 U1.R16@2651.91,2537.66 2635.79,2521.54
TSXP: pad.PB4 U1.P16 | length 1583.3
  Top Layer w5: pad.PB4@1993.73,2067.42 2037.76,2054.24 ; pad.PB4@1995.47,2072.24 2037.76,2054.24 ; pad.PB4@1997.71,2076.78 2037.76,2054.24 ; pad.PB4@2000.41,2081.02 2037.76,2054.24 ; pad.PB4@2005.26,2086.74 2037.76,2054.24 ; pad.PB4@2006.82,2074.34 cw(c2009.29,2054.66) 2023.31,2068.69 cw(c2037.34,2082.71) pad.PB4@2017.66,2085.18 ; pad.PB4@2007.44,2069.38 cw(c2010.91,2041.84) 2030.54,2061.46 cw(c2050.16,2081.09) pad.PB4@2022.62,2084.56 ; pad.PB4@2008.07,2064.42 cw(c2012.52,2029.01) 2037.76,2054.24 ; pad.PB4@2010.98,2091.59 2037.76,2054.24 ; pad.PB4@2015.22,2094.29 2037.76,2054.24 ; pad.PB4@2019.76,2096.53 2037.76,2054.24 ; pad.PB4@2024.58,2098.27 2037.76,2054.24 ; pad.PB4@2027.58,2083.93 ccw(c2062.99,2079.48) 2037.76,2054.24 ; U1.P16@2678.03,2537.66 cw(c2665.06,2537.66) 2674.23,2528.49 cw(c2683.41,2519.31) U1.P16@2683.41,2532.29 ; U1.P16@2679.18,2540.99 2667.28,2521.54 ; U1.P16@2686.73,2533.44 2667.28,2521.54 ; 2037.76,2054.24 2106.24,2054.24 2152,2100 2388,2100 2667.28,2379.28 2667.28,2521.54 ; 2667.28,2521.54 U1.P16@2683.41,2537.66 2667.28,2521.54
TSYM: pad.PB1 U1.T16 | length 1838.9
  Top Layer w5: pad.PB1@2061.5,2008 cw(c2007.18,2008) 2045.59,1969.59 cw(c2084,1931.18) pad.PB1@2084,1985.5 ; pad.PB1@2064.94,2019.95 2048.39,1972.39 ; pad.PB1@2066.5,2008 cw(c2024.25,2008) 2054.13,1978.13 cw(c2084,1948.25) pad.PB1@2084,1990.5 ; pad.PB1@2069.66,2018.04 2048.39,1972.39 ; pad.PB1@2071.5,2008 cw(c2041.32,2008) 2062.66,1986.66 cw(c2084,1965.32) pad.PB1@2084,1995.5 ; pad.PB1@2074.13,2015.67 2048.39,1972.39 ; pad.PB1@2078.32,2012.89 2048.39,1972.39 ; pad.PB1@2084,2008 2044,1968 1988,1968 1960,1996 1960,2105.14 1987.84,2132.98 2301.98,2132.98 2357,2188 2357,2212.44 2605.04,2460.48 2605.04,2522.29 ; pad.PB1@2088.89,2002.32 2048.39,1972.39 ; pad.PB1@2091.67,1998.13 2048.39,1972.39 ; pad.PB1@2094.04,1993.66 2048.39,1972.39 ; pad.PB1@2095.95,1988.94 2048.39,1972.39 ; U1.T16@2615.04,2537.66 cw(c2602.06,2537.66) 2611.24,2528.49 cw(c2620.41,2519.31) U1.T16@2620.41,2532.29 ; U1.T16@2616.17,2540.96 2605.04,2522.29 ; U1.T16@2623.71,2533.42 2605.04,2522.29 ; 2605.04,2522.29 U1.T16@2620.41,2537.66 2605.04,2522.29
TSYP: pad.PB2 U1.T17 | length 1655.2
  Top Layer w5: pad.PB2@1982.8,2009.4 ccw(c1938.89,2012.15) 1970,2043.26 ; pad.PB2@1986.17,1996.09 1970,2043.26 ; pad.PB2@1987.79,2009.09 ccw(c1953.64,2011.22) 1977.84,2035.42 ccw(c2002.04,2059.62) pad.PB2@2004.17,2025.47 ; pad.PB2@1990.91,1997.99 1970,2043.26 ; pad.PB2@1992.78,2008.78 ccw(c1968.39,2010.3) 1985.67,2027.59 ccw(c2002.96,2044.87) pad.PB2@2004.48,2020.48 ; pad.PB2@1995.38,2000.34 1970,2043.26 ; pad.PB2@1999.57,2003.11 1970,2043.26 ; pad.PB2@2003.86,2030.46 cw(c2001.11,2074.37) 1970,2043.26 ; pad.PB2@2010.15,2013.69 1970,2043.26 ; pad.PB2@2012.92,2017.88 1970,2043.26 ; pad.PB2@2015.27,2022.35 1970,2043.26 ; pad.PB2@2017.17,2027.09 1970,2043.26 ; U1.T17@2615.08,2505.53 2620.41,2483.29 U1.T17@2625.75,2505.53 ; U1.T17@2616.61,2502.36 cw(c2607.44,2493.19) 2620.41,2493.19 cw(c2633.39,2493.19) U1.T17@2624.21,2502.36 ; U1.T17@2620.41,2506.16 2620.41,2461.71 2367,2208.3 2367,2183.86 2305.64,2122.5 1991.5,2122.5 1970,2101 1970,2043.26 ; 1970,2043.26 pad.PB2@2005.26,2008 1970,2043.26
TXD0: pad.PA51 U1.K13 | length 1755.8
  Top Layer w5: v1@2789.67,2620.15 U1.K13@2805.15,2635.45 ; v1@2791.8,2621.8 U1.K13@2812.69,2627.91 ; v1@2794,2622.26 ccw(c2794,2635.54) 2803.39,2626.15 ccw(c2812.78,2616.76) v1@2799.5,2616.76 ; v1@2797.39,2612.43 U1.K13@2812.69,2627.91 ; v1@2799.04,2614.56 U1.K13@2805.15,2635.45 ; U1.K13@2804.02,2632.15 cw(c2791.04,2632.15) 2800.22,2622.98 cw(c2809.39,2613.8) U1.K13@2809.39,2626.78 ; v1(2794,2616.76) U1.K13@2809.39,2632.15 ; v1(2794,2616.76) U1.K13@2805.15,2635.45 ; v1(2794,2616.76) U1.K13@2812.69,2627.91 ; v1(2794,2616.76) U1.K13@2809.39,2632.15 ; U1.K13@2809.39,2632.15 2798.35,2613.39 U1.K13@2809.39,2632.15 ; U1.K13@2809.39,2632.15 2790.63,2621.11 U1.K13@2809.39,2632.15
  SIGNAL_1 w5: pad.PA51@2358.75,2072.05 2377.82,2105.72 ; pad.PA51@2363.39,2069.82 2377.82,2105.72 ; pad.PA51@2364.34,2081.99 ccw(c2331.8,2114.53) 2377.82,2114.53 ; pad.PA51@2367.88,2078.46 ccw(c2343.87,2102.46) 2377.82,2102.46 ; pad.PA51@2368.22,2068.24 2377.82,2105.72 ; pad.PA51@2373.16,2067.31 2377.82,2105.72 ; 2377.82,2097.42 ccw(c2409.64,2097.42) pad.PA51@2387.14,2074.92 ; 2377.82,2109.49 ccw(c2421.71,2109.49) pad.PA51@2390.68,2078.46 ; 2377.82,2121.56 ccw(c2433.78,2121.56) pad.PA51@2394.21,2081.99 ; pad.PA51@2385.36,2067.77 2377.82,2105.72 ; pad.PA51@2390.21,2069.07 2377.82,2105.72 ; pad.PA51@2394.91,2071.01 2377.82,2105.72 ; pad.PA51@2399.36,2073.58 2377.82,2105.72 ; v1@2788.5,2616.76 cw(c2775.22,2616.76) 2784.61,2607.37 cw(c2794,2597.98) v1@2794,2611.26 ; v1@2789.68,2620.16 2777.5,2600.26 ; v1@2797.4,2612.44 2777.5,2600.26 ; 2377.82,2105.72 pad.PA51@2379.28,2067.06 2377.82,2068.51 2377.82,2262.03 2536.25,2420.46 2750.38,2420.46 2777.5,2447.58 2777.5,2600.26 ; 2777.5,2600.26 v1(2794,2616.76) 2777.5,2600.26
TXD1: pad.PA49 U1.K16 | length 1452.5
  Top Layer w5: U1.K16@2806.09,2533.42 2824.76,2522.29 ; U1.K16@2809.39,2532.29 cw(c2809.39,2519.31) 2818.56,2528.49 cw(c2827.74,2537.66) U1.K16@2814.76,2537.66 ; U1.K16@2809.39,2537.66 2824.76,2522.29 ; U1.K16@2813.63,2540.96 2824.76,2522.29 ; v1@2819.29,2463.31 2824.41,2485.74 ; v1@2820.87,2466.63 ccw(c2812.34,2475.16) 2824.41,2475.16 ; v1@2824.41,2463.09 2824.41,2486.33 ; 2824.41,2476.86 ccw(c2838.89,2476.86) v1@2828.65,2466.63 ; v1(2824.76,2462.74) 2824.41,2485.74 ; 2824.76,2486.68 2824.76,2522.29 ; v1@2830.21,2463.48 2824.41,2485.74
  SIGNAL_1 w5: pad.PA49@2436.97,2065.24 2443.5,2112.4 ; pad.PA49@2442.05,2064.81 2443.5,2112.4 ; pad.PA49@2447.1,2064.93 2443.5,2112.4 ; pad.PA49@2452.08,2065.57 2443.5,2112.4 ; pad.PA49@2463.71,2069.29 2443.5,2112.4 ; pad.PA49@2468.14,2071.66 2443.5,2112.4 ; pad.PA49@2472.32,2074.5 2443.5,2112.4 ; pad.PA49@2476.2,2077.8 2443.5,2112.4 ; v1@2819.3,2462.08 2824.76,2439.74 ; v1@2820.87,2458.85 cw(c2811.49,2449.46) 2824.76,2449.46 cw(c2838.04,2449.46) v1@2828.65,2458.85 ; v1@2830.22,2462.08 2824.76,2439.74 ; 2443.5,2112.4 pad.PA49@2458.02,2067.06 2443.5,2081.57 2443.5,2285.28 2535.22,2377 2774.56,2377 2824.76,2427.2 v1(2824.76,2462.74) 2824.76,2439.74
TXD2: pad.PA47 U1.J11 | length 2561.4
  Top Layer w5: v1@2820.69,2707.59 U1.J11@2836.66,2691.82 ; v1@2822.75,2705.98 U1.J11@2844.2,2699.37 ; v1@2825,2705.5 cw(c2825,2692.15) 2834.44,2701.59 ; v1@2828.4,2715.32 U1.J11@2844.2,2699.37 ; v1@2830.01,2713.26 U1.J11@2836.66,2691.82 ; v1@2830.5,2711 ccw(c2843.71,2711) 2834.37,2701.66 ; U1.J11@2835.51,2695.14 ccw(c2822.54,2695.14) 2831.71,2704.32 ccw(c2840.89,2713.49) U1.J11@2840.89,2700.52 ; v1(2825,2711) U1.J11@2840.89,2695.14 ; v1(2825,2711) U1.J11@2844.2,2699.37 ; v1(2825,2711) U1.J11@2836.66,2691.82 ; v1(2825,2711) U1.J11@2840.89,2695.14 ; v1(2825,2711) U1.J11@2840.89,2695.14 ; v1(2825,2711) U1.J11@2844.2,2699.37 ; v1(2825,2711) U1.J11@2836.66,2691.82 ; v1(2825,2711) U1.J11@2840.89,2695.14 ; U1.J11@2840.89,2695.14 2821.62,2706.66 U1.J11@2840.89,2695.14 ; U1.J11@2840.89,2695.14 2829.33,2714.39 U1.J11@2840.89,2695.14
  SIGNAL_1 w5: v1@2374.5,2602 ccw(c2361.22,2602) 2370.61,2611.39 ccw(c2380,2620.78) v1@2380,2607.5 ; v1@2375.59,2598.71 2366.5,2615.5 ; v1@2383.29,2606.41 2366.5,2615.5 ; 2661.2,2694.7 2629.55,2694.7 2620.27,2685.42 2620.27,2669.27 2614,2663 2592,2663 2588,2667 2588,2689 2575,2702 2540,2702 2525.98,2716.02 2405.52,2716.02 2366.5,2677 2366.5,2615.5 ; 2662,2695.5 2754.58,2695.5 2809.48,2695.48 ; v1@2819.5,2711 cw(c2806.22,2711) 2815.61,2701.61 cw(c2825,2692.22) v1@2825,2705.5 ; v1@2820.65,2714.37 2809.48,2695.48 ; v1@2828.37,2706.65 2809.48,2695.48 ; 2366.5,2615.5 v1(2380,2602) 2366.5,2615.5 ; 2809.48,2695.48 v1(2825,2711) 2809.48,2695.48
  SIGNAL_2 w5: v1@2374.5,2602 cw(c2361.22,2602) 2370.61,2592.61 cw(c2380,2583.22) v1@2380,2596.5 ; v1@2375.73,2605.46 2361.39,2583.39 ; v1@2383.46,2597.73 2361.39,2583.39 ; 2494.91,2117.09 cw(c2444.87,2067.06) pad.PA47@2515.63,2067.06 ; 2503.44,2108.56 cw(c2461.94,2067.06) pad.PA47@2520.63,2067.06 ; 2511.98,2100.02 cw(c2479.02,2067.06) pad.PA47@2525.63,2067.06 ; 2514.68,2097.32 ccw(c2536.76,2119.4) pad.PA47@2536.76,2088.18 ; pad.PA47@2517.71,2057.93 2506.74,2105.26 ; 2520.52,2091.48 cw(c2496.09,2067.06) pad.PA47@2530.63,2067.06 ; pad.PA47@2522.6,2059.34 2506.74,2105.26 ; 2523.21,2088.79 ccw(c2536.76,2102.33) pad.PA47@2536.76,2083.18 ; pad.PA47@2527.28,2061.23 2506.74,2105.26 ; pad.PA47@2531.71,2063.58 2506.74,2105.26 ; pad.PA47@2541.32,2071.13 2506.74,2105.26 ; pad.PA47@2544.66,2074.88 2506.74,2105.26 ; pad.PA47@2547.61,2078.98 2506.74,2105.26 ; pad.PA47@2550.13,2083.4 2506.74,2105.26 ; 2361.39,2583.39 v1(2380,2602) 2358,2580 2358,2493.94 2336.5,2472.44 2336.5,2275.5 2536.76,2075.24 pad.PA47@2536.76,2067.06 2506.74,2105.26
UPLLCAP: C41.1 U1.P17 | length 321.1
  Top Layer w5: U1.P17@2679.61,2502.36 cw(c2672.62,2495.38) 2682.5,2495.38 ; 2682.5,2491 cw(c2698.57,2491) U1.P17@2687.21,2502.36 ; U1.P17@2683.41,2506.16 2682.5,2505.26 2682.5,2433.5 ; 2684.34,2431.66 cw(c2668.04,2415.36) C41.1@2690.56,2410.45 ; C41.1@2686.11,2404.66 2682.5,2433.5 ; 2690.81,2425.19 cw(c2678.66,2413.04) C41.1@2695.45,2409.38 ; C41.1@2691.07,2405.73 2682.5,2433.5 ; C41.1@2692.37,2423.63 ccw(c2697.89,2429.15) C41.1@2697.89,2421.35 ; C41.1@2697.89,2403.85 2697.89,2418.11 2682.5,2433.5 ; C41.1@2697.89,2408.85 2682.5,2433.5 ; C41.1@2703.68,2413.6 2682.5,2433.5 ; C41.1@2706.82,2417.59 2682.5,2433.5
VCLK: pad.PB33 U1.L4 | length 2004.2
  Top Layer w5: v1@2758.17,2927.62 U1.L4@2773.65,2912.31 ; v1@2760.3,2925.97 U1.L4@2781.2,2919.85 ; v1@2762.5,2925.51 cw(c2762.5,2912.23) 2771.89,2921.62 cw(c2781.28,2931.01) v1@2768,2931.01 ; v1@2765.89,2935.34 U1.L4@2781.2,2919.85 ; v1@2767.54,2933.21 U1.L4@2773.65,2912.31 ; U1.L4@2772.52,2915.61 ccw(c2759.55,2915.61) 2768.72,2924.79 ccw(c2777.89,2933.96) U1.L4@2777.89,2920.99 ; v1(2762.5,2931.01) U1.L4@2777.89,2915.61 ; v1(2762.5,2931.01) U1.L4@2781.2,2919.85 ; v1(2762.5,2931.01) U1.L4@2773.65,2912.31 ; v1(2762.5,2931.01) U1.L4@2777.89,2915.61 ; U1.L4@2777.89,2915.61 2759.13,2926.66 U1.L4@2777.89,2915.61 ; U1.L4@2777.89,2915.61 2766.85,2934.37 U1.L4@2777.89,2915.61
  Bottom Layer w5: pad.PB33@2061.52,3266.9 cw(c2014.45,3264.92) 2047.76,3231.6 ; pad.PB33@2064.94,3279.8 2048.39,3232.24 ; pad.PB33@2066.52,3267.11 cw(c2029.9,3265.57) 2055.82,3239.66 cw(c2081.73,3213.75) pad.PB33@2083.27,3250.36 ; pad.PB33@2069.66,3277.88 2048.39,3232.24 ; pad.PB33@2071.51,3267.32 cw(c2045.36,3266.22) 2063.87,3247.71 cw(c2082.38,3229.2) pad.PB33@2083.48,3255.35 ; pad.PB33@2074.13,3275.52 2048.39,3232.24 ; pad.PB33@2078.32,3272.74 2048.39,3232.24 ; pad.PB33@2083.06,3245.36 ccw(c2081.08,3198.29) 2047.76,3231.6 ; pad.PB33@2084,3267.84 2047.76,3231.6 ; pad.PB33@2088.89,3262.16 2048.39,3232.24 ; pad.PB33@2091.67,3257.97 2048.39,3232.24 ; pad.PB33@2094.04,3253.51 2048.39,3232.24 ; pad.PB33@2095.95,3248.78 2048.39,3232.24 ; 2562.76,3135 2570,3135 ; v1@2759.13,2935.35 2778.02,2946.53 ; v1(2762.5,2931.01) 2778.02,2946.53 ; v1@2762.5,2936.51 ccw(c2762.5,2949.79) 2771.89,2940.4 ccw(c2781.28,2931.01) v1@2768,2931.01 ; v1@2766.85,2927.64 2778.02,2946.53 ; 2047.76,3231.6 2047.76,3167.5 2062.26,3153 2115.14,3153 2133.14,3135 2570,3135 ; 2570,3135 2736.07,3135 2746.85,3124.22 2746.85,3036.8 2778.02,3005.62 2778.02,2946.53
VD0: pad.PB27 U1.N2 | length 1421.1
  Top Layer w5: pad.PB27@2072.05,3050.68 2119.61,3067.23 ; pad.PB27@2073.96,3045.96 2119.61,3067.23 ; pad.PB27@2076.33,3041.49 2119.61,3067.23 ; pad.PB27@2079.11,3037.31 2119.61,3067.23 ; pad.PB27@2084,3031.62 2163.38,3111 2604.25,3111 2699,3016.25 2699,2994.51 ; pad.PB27@2084,3044.12 ccw(c2084,3074.3) 2105.34,3052.96 ccw(c2126.68,3031.62) pad.PB27@2096.5,3031.62 ; pad.PB27@2084,3049.12 ccw(c2084,3091.37) 2113.87,3061.5 ccw(c2143.75,3031.62) pad.PB27@2101.5,3031.62 ; pad.PB27@2084,3054.12 ccw(c2084,3108.44) 2122.41,3070.03 ccw(c2160.82,3031.62) pad.PB27@2106.5,3031.62 ; pad.PB27@2089.68,3026.73 2119.61,3067.23 ; pad.PB27@2093.87,3023.95 2119.61,3067.23 ; pad.PB27@2098.34,3021.59 2119.61,3067.23 ; pad.PB27@2103.06,3019.67 2119.61,3067.23 ; U1.N2@2709.53,2978.61 ccw(c2696.55,2978.61) 2705.73,2987.78 ccw(c2714.9,2996.95) U1.N2@2714.9,2983.98 ; U1.N2@2710.68,2975.29 2699,2994.51 ; U1.N2@2718.22,2982.83 2699,2994.51 ; 2699,2994.51 U1.N2@2714.9,2978.61 2699,2994.51
VD1: pad.PB28 U1.L6 | length 1882.8
  Top Layer w5: v1@2757.71,2840.44 U1.L6@2773.69,2855.97 ; v1@2759.8,2842.04 U1.L6@2781.17,2848.36 ; v1@2762,2842.5 ccw(c2762,2855.78) 2771.39,2846.39 ccw(c2780.78,2837) v1@2767.5,2837 ; v1@2765.37,2832.65 U1.L6@2781.17,2848.36 ; v1@2766.31,2833.58 U1.L6@2777.89,2852.62 ; v1@2766.34,2833.63 U1.L6@2777.62,2852.62 ; v1@2767,2834.71 U1.L6@2773.69,2855.97 ; 2768.26,2843.26 cw(c2777.89,2833.62) U1.L6@2777.89,2847.25 ; 2768.91,2843.91 ccw(c2760.2,2852.62) U1.L6@2772.52,2852.62 ; v1(2762,2837) U1.L6@2777.89,2852.62 ; v1(2762,2837) U1.L6@2773.69,2855.97 ; v1(2762,2837) U1.L6@2781.17,2848.36 ; v1(2762,2837) U1.L6@2777.62,2852.62 ; U1.L6@2777.62,2852.62 2758.63,2841.34 U1.L6@2777.89,2852.62
  Bottom Layer w5: pad.PB28@1993.31,3050.69 2040.84,3067.2 ; pad.PB28@1995.23,3045.96 2040.84,3067.2 ; pad.PB28@1997.59,3041.49 2040.84,3067.2 ; pad.PB28@2000.37,3037.31 2040.84,3067.2 ; pad.PB28@2005.26,3031.62 2040.84,3067.2 ; pad.PB28@2005.95,3044.1 ccw(c2007.35,3069.07) 2025.03,3051.39 ccw(c2042.71,3033.71) pad.PB28@2017.74,3032.32 ; pad.PB28@2006.23,3049.09 ccw(c2008.18,3084.05) 2032.93,3059.29 ccw(c2057.68,3034.54) pad.PB28@2022.73,3032.59 ; pad.PB28@2006.51,3054.09 ccw(c2009.01,3099.02) 2040.84,3067.2 ; pad.PB28@2010.94,3026.73 2040.84,3067.2 ; pad.PB28@2015.13,3023.95 2040.84,3067.2 ; pad.PB28@2019.6,3021.59 2040.84,3067.2 ; pad.PB28@2024.32,3019.67 2040.84,3067.2 ; pad.PB28@2027.73,3032.87 cw(c2072.66,3035.38) 2040.84,3067.2 ; v1@2756.54,2837.66 2762,2860 v1@2767.46,2837.66 ; v1@2758.11,2840.89 ccw(c2748.72,2850.28) 2762,2850.28 ccw(c2775.28,2850.28) v1@2765.89,2840.89 ; v1(2762,2837) 2762,2870.9 2717.29,2915.61 2717.17,2915.5 2567.08,2915.5 2518,2964.58 2518,3036 2486.8,3067.2 2040.84,3067.2
VD2: pad.PB25 U1.N4 | length 2172.2
  Top Layer w5: v1@2694.64,2928.65 U1.N4@2710.68,2912.3 ; v1@2696.64,2927.03 U1.N4@2718.22,2919.84 ; v1@2699,2926.5 cw(c2699,2914.39) 2707.56,2922.95 ; v1@2702.48,2936.26 U1.N4@2718.22,2919.84 ; v1@2704.03,2934.22 U1.N4@2710.68,2912.3 ; v1@2704.5,2932 ccw(c2718.95,2932) 2708.73,2921.78 ; U1.N4@2709.53,2915.61 ccw(c2696.55,2915.61) 2705.73,2924.79 ccw(c2714.9,2933.96) U1.N4@2714.9,2920.99 ; v1@2699,2931.52 U1.N4@2714.9,2915.61 ; v1@2699,2931.52 U1.N4@2718.22,2919.84 ; v1@2699,2931.52 U1.N4@2710.68,2912.3 ; v1@2699,2931.52 U1.N4@2714.9,2915.61 ; v1(2699,2932) U1.N4@2718.22,2919.84 ; v1(2699,2932) U1.N4@2714.9,2915.61 ; v1(2699,2932) U1.N4@2710.68,2912.3 ; v1(2699,2932) U1.N4@2714.9,2915.61 ; U1.N4@2714.9,2915.61 2695.54,2927.72 U1.N4@2714.9,2915.61 ; U1.N4@2714.9,2915.61 2703.38,2935.33 U1.N4@2714.9,2915.61
  SIGNAL_1 w5: v1@2027.3,2995.29 2039,3020.79 ; v1@2028.61,2997.39 ccw(c2003.53,3022.47) 2039,3022.47 ; v1@2032.15,2993.85 ccw(c2015.6,3010.4) 2039,3010.4 ; v1@2035.68,2990.32 ccw(c2027.67,2998.33) 2039,2998.33 ; v1@2037.95,2992.76 2039,3020.79 ; pad.PB25@2084,2952.88 pad.PB25@2087.62,2956.5 ; v1(2699,2932) 2693.5,2937.5 2693.5,3015.4 2572.3,3136.6 2167.32,3136.6 2106.72,3076 2064.36,3076 2039,3050.64 2039,3000 v1(2032.5,2993.5) 2039,3020.79
  SIGNAL_2 w5: v1@2029.04,2989.23 2051.11,2974.89 v1@2036.77,2996.96 ; v1@2032.5,2988 cw(c2032.5,2974.72) 2041.89,2984.11 cw(c2051.28,2993.5) v1@2038,2993.5 ; v1(2032.5,2993.5) 2073.12,2952.88 pad.PB25@2084,2952.88 2045.36,2980.64 ; v1@2037.94,2988.06 ccw(c2071.34,3021.46) pad.PB25@2079.92,2975.01 ; 2044.67,2981.33 ccw(c2073.44,3010.1) pad.PB25@2080.82,2970.09 ; 2051.39,2974.61 ccw(c2075.53,2998.75) pad.PB25@2081.73,2965.17 ; 2053.28,2972.72 cw(c2033.45,2952.88) pad.PB25@2061.5,2952.88 ; 2058.12,2967.88 ccw(c2077.63,2987.39) pad.PB25@2082.64,2960.26 ; pad.PB25@2066.92,2938.23 2045.36,2980.64 ; pad.PB25@2071.35,2940.79 2045.36,2980.64 ; pad.PB25@2075.44,2943.78 2045.36,2980.64 ; pad.PB25@2079.16,2947.15 2045.36,2980.64 ; pad.PB25@2087.88,2959.3 2045.36,2980.64 ; pad.PB25@2089.9,2963.9 2045.36,2980.64 ; pad.PB25@2091.42,2968.73 2045.36,2980.64 ; pad.PB25@2092.43,2973.74 2045.36,2980.64
VD3: pad.PB26 U1.R1 | length 1582.6
  Top Layer w5: pad.PB26@2000.8,2974.94 2053.64,2974.14 ; pad.PB26@2000.97,2969.85 2053.64,2974.14 ; pad.PB26@2001.62,2964.84 2053.64,2974.14 ; pad.PB26@2002.74,2959.95 2053.64,2974.14 ; pad.PB26@2003.63,2945.56 ccw(c2010.73,2977.49) 2033.86,2954.36 ; pad.PB26@2004.72,2950.44 ccw(c2013.08,2988.03) 2040.3,2960.8 ; pad.PB26@2005.8,2955.32 ccw(c2015.42,2998.56) 2046.74,2967.24 ; pad.PB26@2006.89,2960.2 ccw(c2017.76,3009.1) 2053.18,2973.68 ; pad.PB26@2007.97,2965.08 ccw(c2020.1,3019.63) 2059.62,2980.12 ; pad.PB26@2008.76,2946.25 2053.64,2974.14 ; pad.PB26@2009.06,2969.96 ccw(c2022.45,3030.17) 2066.06,2986.56 ; pad.PB26@2010.14,2974.85 ccw(c2024.79,3040.71) 2072.5,2993 ; pad.PB26@2011.61,2942.11 2053.64,2974.14 ; pad.PB26@2014.86,2938.25 2053.64,2974.14 ; pad.PB26@2018.49,2934.68 2053.64,2974.14 ; U1.R1@2646.65,3011.21 2651.91,3023.09 ; U1.R1@2648.11,3013.9 ccw(c2638.94,3023.08) 2651.91,3023.08 ; U1.R1@2651.91,3010.1 2651.91,3023.09 ; U1.R1@2655.71,3013.9 cw(c2664.88,3023.08) 2651.91,3023.08 ; U1.R1@2657.17,3011.21 2651.91,3023.09 ; 2053.64,2974.14 pad.PB26@2005.26,2952.88 2032.38,2952.88 2072.5,2993 ; 2072.5,2993 2125,2993 2179,3047 2628,3047 2651.91,3023.09
VD4: pad.PB23 U1.N3 | length 2019.1
  Top Layer w5: U1.N3@2714.9,2952.48 ccw(c2714.9,2965.46) 2724.08,2956.28 ccw(c2733.25,2947.11) U1.N3@2720.28,2947.11 ; 2720.9,2953.11 ccw(c2711.01,2963) v1@2725,2963 ; 2721.62,2953.82 cw(c2730.5,2944.94) v1@2730.5,2957.5 ; v1@2725.46,2965.2 U1.N3@2719.14,2943.8 ; v1@2726.13,2966.34 U1.N3@2714.9,2947.11 ; v1@2727.06,2967.29 U1.N3@2711.59,2951.34 ; v1@2732.79,2958 U1.N3@2711.59,2951.34 ; v1@2733.92,2958.7 U1.N3@2714.9,2947.11 ; v1@2734.85,2959.64 U1.N3@2719.14,2943.8 ; U1.N3@2711.59,2951.34 v1(2730.5,2963) ; U1.N3@2711.59,2951.34 v1@2730.5,2962.71 ; U1.N3@2714.9,2947.11 v1(2730.5,2963) ; U1.N3@2714.9,2947.11 v1@2730.5,2962.71 ; U1.N3@2719.14,2943.8 v1(2730.5,2963) ; U1.N3@2719.14,2943.8 v1@2730.5,2962.71 ; v1@2730.5,2962.71 v1(2730.5,2963)
  SIGNAL_1 w5: v1@1930.54,2953.66 1936,2976 v1@1941.46,2953.66 ; v1@1932.11,2956.89 ccw(c1922.72,2966.28) 1936,2966.28 ccw(c1949.28,2966.28) v1@1939.89,2956.89 ; v1(1936,2953) 1936,3122 1970.6,3156.6 2580.59,3156.6 2713.5,3023.69 2713.5,2981 ; 2720.4,2974.1 cw(c2709.31,2963) v1@2725,2963 ; 2722.82,2971.69 ccw(c2730.5,2979.37) v1@2730.5,2968.5 ; v1@2726.11,2959.7 2713.5,2981 ; v1@2734.05,2967.2 2713.5,2981 ; 2713.5,2981 v1(2730.5,2963) 2731,2963.5 2713.5,2981
  Bottom Layer w5: v1@1932.54,2948.73 1954.61,2934.39 v1@1940.27,2956.46 ; v1@1936,2947.5 cw(c1936,2934.22) 1945.39,2943.61 cw(c1954.78,2953) v1@1941.5,2953 ; v1(1936,2953) 1968.62,2920.38 2029.4,2920.38 2075.64,2874.14 pad.PB23@2084,2874.14 ; 2033.58,2916.2 ccw(c2080.93,2963.55) pad.PB23@2083.23,2896.63 ; 2041.72,2908.06 ccw(c2081.47,2947.81) pad.PB23@2083.4,2891.63 ; 2049.86,2899.93 ccw(c2082.01,2932.08) pad.PB23@2083.57,2886.63 ; 2051.5,2898.28 cw(c2027.36,2874.14) pad.PB23@2061.5,2874.14 ; 2058,2891.79 ccw(c2082.55,2916.34) pad.PB23@2083.74,2881.64 ; 2060.04,2889.75 cw(c2044.43,2874.14) pad.PB23@2066.5,2874.14
VD5: pad.PB24 U1.P2 | length 1301.6
  Top Layer w5: v1@2663.48,2966.4 U1.P2@2679.17,2981.92 ; v1@2665.58,2968.03 U1.P2@2686.72,2974.37 ; v1@2667.8,2968.5 ccw(c2667.8,2981.78) 2677.19,2972.39 ccw(c2686.58,2963) v1@2673.3,2963 ; v1@2671.2,2958.68 U1.P2@2686.72,2974.37 ; v1@2672.83,2960.78 U1.P2@2679.17,2981.92 ; U1.P2@2678.03,2978.61 cw(c2665.06,2978.61) 2674.23,2969.43 cw(c2683.41,2960.26) U1.P2@2683.41,2973.23 ; v1(2667.8,2963) U1.P2@2683.41,2978.61 ; v1(2667.8,2963) U1.P2@2679.17,2981.92 ; v1(2667.8,2963) U1.P2@2686.72,2974.37 ; v1(2667.8,2963) U1.P2@2683.41,2978.61 ; U1.P2@2683.41,2978.61 2672.14,2959.63 U1.P2@2683.41,2978.61 ; U1.P2@2683.41,2978.61 2664.43,2967.34 U1.P2@2683.41,2978.61
  SIGNAL_1 w5: pad.PB24@2005.26,2874.14 2046.06,2914.94 2092.02,2914.94 2123.71,2946.63 2123.71,3064.71 2175.6,3116.6 2514.2,3116.6 v1(2667.8,2963) 2649.19,2981.61 ; v1@2662.3,2963 ccw(c2649.02,2963) 2658.41,2972.39 ccw(c2667.8,2981.78) v1@2667.8,2968.5 ; v1@2663.53,2959.54 2649.19,2981.61 ; v1@2671.26,2967.27 2649.19,2981.61